# Altium PCB PCB_Mainboard.PcbDoc
Units mil, origin at the board's own origin, x right, y up, seen from the top; angles counter-clockwise.
Board outline 8863.19 x 4814.23 mil, 2 copper layers (Top Layer, Bottom Layer); 43 components, 31 nets, 377 pads, 3 vias.
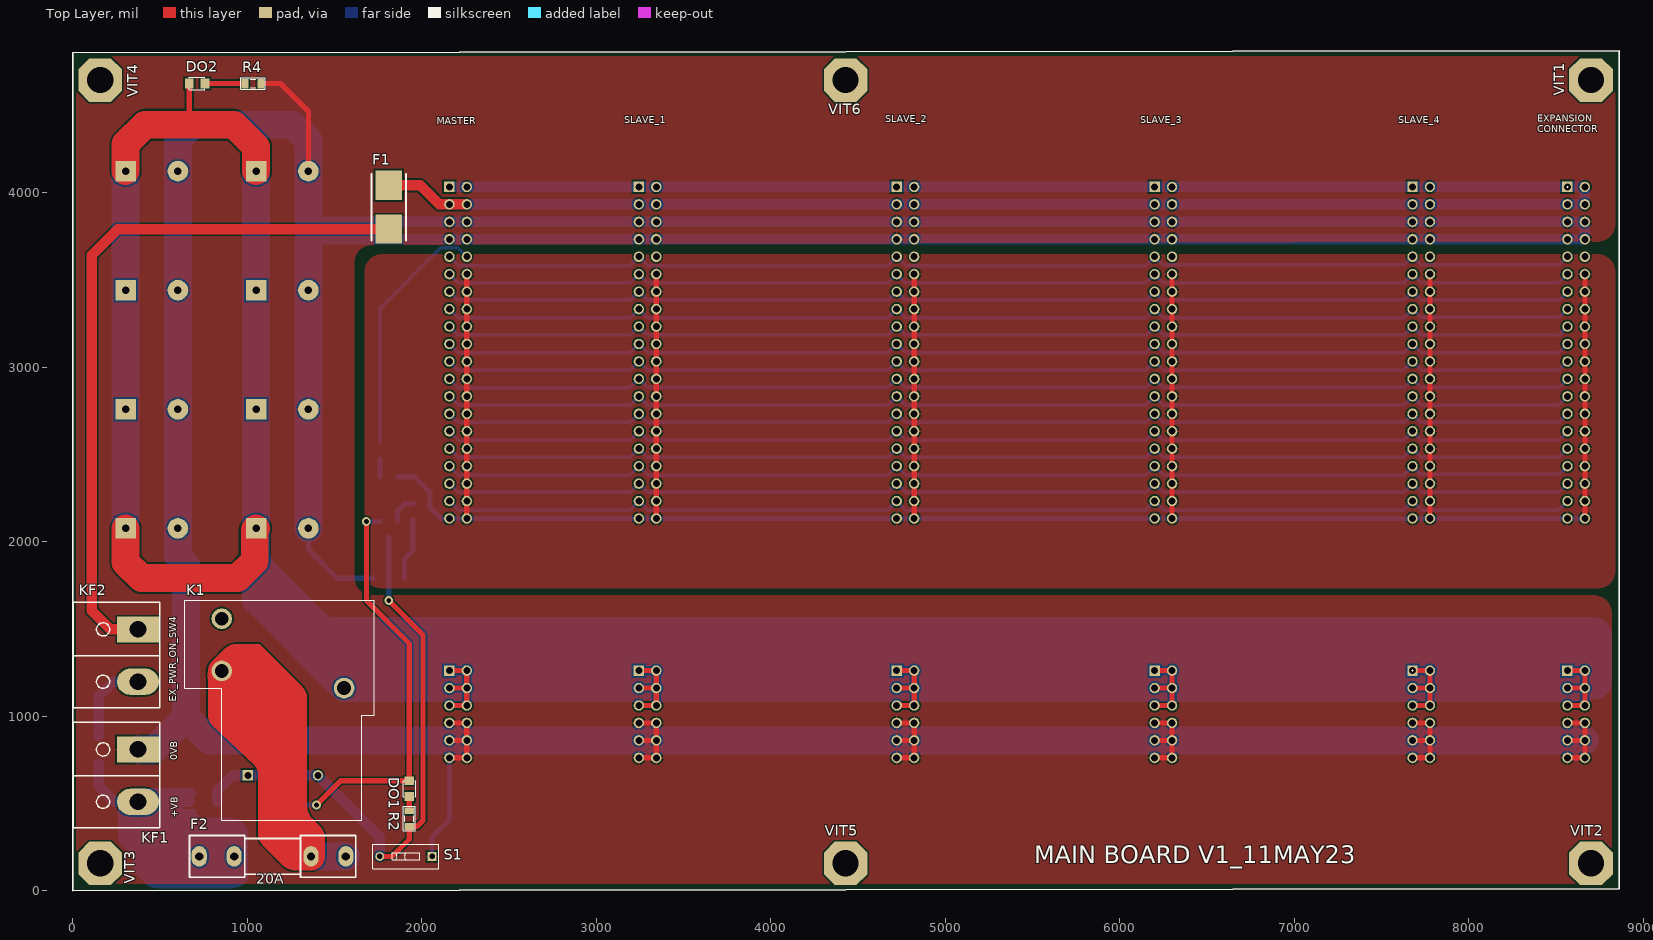
[diagram p0: Top Layer view]
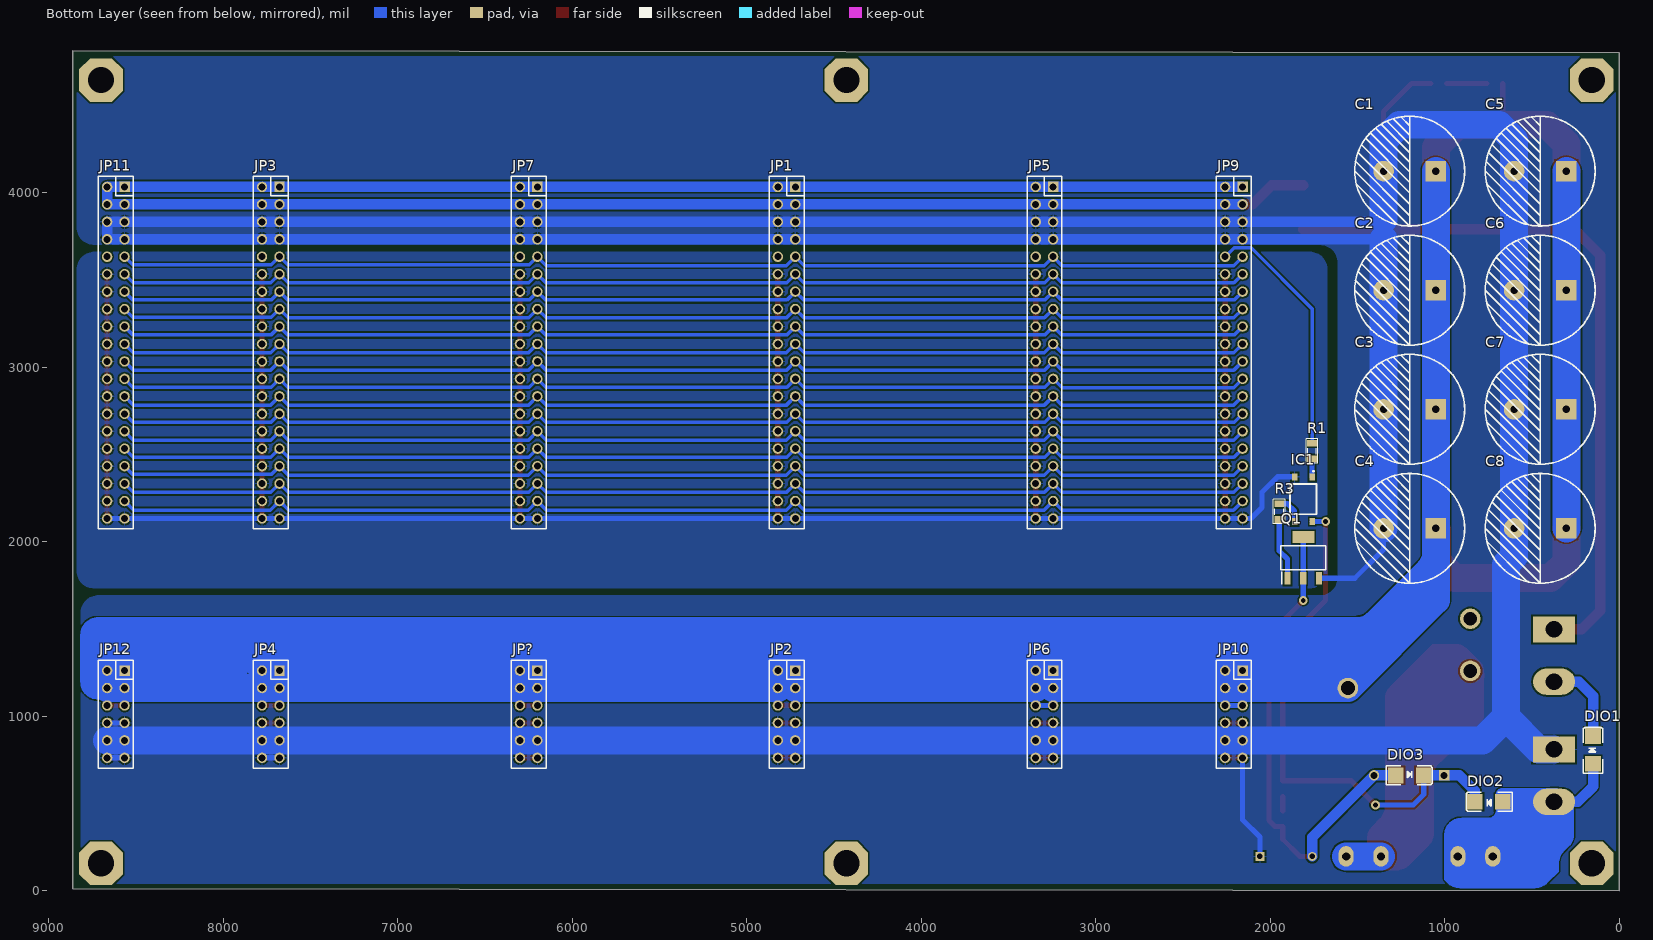
[diagram p1: Bottom Layer view, seen from below]

## Layer stack, top to bottom
Top Solder: solder mask 0.4, Solder Resist, Dk 3.5
Top Layer: signal copper 1.4
Dielectric 1: dielectric 12.6, FR-4, Dk 4.8
Bottom Layer: signal copper 1.4
Bottom Solder: solder mask 0.4, Solder Resist, Dk 3.5

## Board outline
0,0 0,4803.15 8863.19,4814.23 8863.19,11.08

## Design rules (kind name [scope] priority, off if disabled: settings)
Clearance [All] p1: gap=10
PolygonConnect [All] p1: connectstyle=Relief reliefconductorwidth=10 reliefentries=4 polygonreliefangle="90 Angle" airgapwidth=10
RoomDefinition Terminal [InComponentClass('Terminal')] p1: confinementstyle=ConfineIn formatcopy=TRUE lockcomponents=FALSE outline 8917.31,59.05 9507.85,59.05 9507.85,433.07 8917.31,433.07
RoutingVias [All] p1: holewidth=28 width=50 viastyle="Through Hole" minholewidth=28 minwidth=50 maxholewidth=28 maxwidth=50
SolderMaskExpansion [All] p1: expansion=4
Width [All] p1: maxlimit=160 minlimit=20 preferedwidth=30
30 further rules are at their usual default settings.

## Components (designator, comment, footprint, x,y, rotation, side; value= is the part's Value field where it differs from the comment)
C1 "2200uF" "tu hoa 16mm" 1201.29,4124.02 r180 bottom
C2 "2200uF" "tu hoa 16mm" 1201.29,3441.6 r180 bottom
C3 "2200uF" "tu hoa 16mm" 1201.29,2759.19 r180 bottom
C4 "2200uF" "tu hoa 16mm" 1201.29,2076.77 r180 bottom
C5 "2200uF" "tu hoa 16mm" 453.26,4124.02 r180 bottom
C6 "2200uF" "tu hoa 16mm" 453.26,3441.6 r180 bottom
C7 "2200uF" "tu hoa 16mm" 453.26,2759.19 r180 bottom
C8 "2200uF" "tu hoa 16mm" 453.26,2076.77 r180 bottom
DIO1 "Diode SMD" DIO-SMD-106 150.52,807.09 r270 bottom
DIO2 "Diode SMD" DIO-SMD-106 748.03,509.96 r180 bottom
DIO3 "Diode SMD" DIO-SMD-106 1200.79,661.42 r0 bottom
DO1 "LED" LED-0805-Yellow 1929.13,629.92 r270 top
DO2 "LED" LED-0805-Yellow 667.87,4625.98 r0 top
F1 "0154004.DR" 0154001.DRT 1811.02,3917.32 r90 top
F2 "F1A" Fuse1 1145.83,196.85 r0 top
IC1 "LTV-357T" LTV-357T 1811.02,2244.09 r0 bottom
JP1 "JP 2x20 2.54" "JP 2x20 CT" 4772.24,3083.46 r270 bottom
JP2 "JP 2x6 2.54" "JP 2x6 CT" 4772.24,1011.81 r270 bottom
JP3 "JP 2x20 2.54" "JP 2x20 CT" 7728.15,3083.46 r270 bottom
JP4 "JP 2x6 2.54" "JP 2x6 CT" 7728.15,1011.81 r270 bottom
JP5 "JP 2x20 2.54" "JP 2x20 CT" 3294.29,3083.46 r270 bottom
JP6 "JP 2x6 2.54" "JP 2x6 CT" 3294.29,1011.81 r270 bottom
JP7 "JP 2x20 2.54" "JP 2x20 CT" 6250.2,3083.46 r270 bottom
JP9 "JP 2x20 2.54" "JP 2x20 CT" 2208.86,3083.46 r270 bottom
JP10 "JP 2x6 2.54" "JP 2x6 CT" 2208.86,1011.81 r270 bottom
JP11 "JP 2x20 2.54" "JP 2x20 CT" 8615.94,3083.46 r270 bottom
JP12 "JP 2x6 2.54" "JP 2x6 CT" 8615.94,1011.81 r270 bottom
JP? "JP 2x6 2.54" "JP 2x6 CT" 6250.2,1011.81 r270 bottom
K1 "SLA-24VDC-SL-A" SLA24VDCSLA 1003.94,661.42 r0 top
KF1 "CON 2 KF7.62" "CON 2 KF7.62" 374.06,807.96 r270 top
KF2 "CON 2 KF7.62" "CON 2 KF7.62" 374.06,1496.06 r270 top
Q1 "BCP54TA" SOT230P700X165-4N 1811.02,1909.45 r90 bottom
R1 "820R" RES-SMD-0805 1761.02,2519.68 r90 bottom
R2 "2.2k" RES-SMD-0805 1929.13,413.39 r270 top
R3 "820R" RES-SMD-0805 1948.82,2173.23 r90 bottom
R4 "2.2k" RES-SMD-0805 1033.45,4625.98 r0 top
S1 "=partNo" SW-DIP1-1 1909.45,196.85 r90 top
VIT1 "1" VIT 8700.79,4645.67 r0 top
VIT2 "1" VIT 8700.79,157.48 r0 top
VIT3 "1" VIT 157.48,157.48 r0 top
VIT4 "1" VIT 157.48,4645.67 r0 top
VIT5 "1" VIT 4429.13,157.48 r0 top
VIT6 "1" VIT 4429.13,4645.67 r0 top

## Footprints (in the part's own frame and the unit in brackets; to place one, negate y for a bottom-side part, rotate by r counter-clockwise, add the part's x,y. Pads: shape width x height; smd on the part's side, far side on the other; paste and mask are expansions set on the pad)
0154001.DRT [mil]
  rect 167x150 smd: 1(-125.5,0) 2(125.5,0)
  silkscreen extent -192,-99 192,99, body extent -192,-99 192,99, height 150
"CON 2 KF7.62" [mil]
  rect 150x240 hole 95: 1(-2,0)
  oval 150x240 hole 95: 2(298,0)
  silkscreen extent -157,-370 448,126, body extent -152,-370 448,122, height 493
DIO-SMD-106 [mil]
  rect 90x90.55 smd: 1(80,0) 2(-80,0)
  silkscreen extent -130,-55 135,55, body extent -99,-50 106,52, height 95
Fuse1 [mm]
  oval 2.2x3 hole 1.2: 1(-10.684,0) 1(-5.604,0) 2(5.579,0) 2(10.659,0)
  silkscreen extent -12.12,-3.05 12.09,3.05, body extent -10.84,-2.95 10.87,2.95, height 9.75
"JP 2x6 CT" [mm] "12 pins, dual row, straight, gold plating"
  rect 1.52x1.52 hole 1.02: 1(-6.35,1.27)
  round 1.52 hole 1.02: 2(-3.81,1.27) 3(-1.27,1.27) 4(1.27,1.27) 5(3.81,1.27) 6(6.35,1.27) 7(6.35,-1.27) 8(3.81,-1.27) 9(1.27,-1.27) 10(-1.27,-1.27) 11(-3.81,-1.27) 12(-6.35,-1.27)
  silkscreen extent -7.87,-2.54 7.87,2.54, body extent -7.87,-2.54 7.87,2.54, height 8.51
"JP 2x20 CT" [mm] "40 pins, dual row, straight, gold plating"
  rect 1.52x1.52 hole 1.02: 1(-24.13,1.27)
  round 1.52 hole 1.02: 2(-21.59,1.27) 3(-19.05,1.27) 4(-16.51,1.27) 5(-13.97,1.27) 6(-11.43,1.27) 7(-8.89,1.27) 8(-6.35,1.27) 9(-3.81,1.27) 11(1.27,1.27) 12(3.81,1.27) 13(6.35,1.27) 14(8.89,1.27) 15(11.43,1.27) 16(13.97,1.27) 17(16.51,1.27) 18(19.05,1.27) 19(21.59,1.27) 20(24.13,1.27) 21(24.13,-1.27) 22(21.59,-1.27) 23(19.05,-1.27) 24(16.51,-1.27) 25(13.97,-1.27) 26(11.43,-1.27) 27(8.89,-1.27) 28(6.35,-1.27) 29(3.81,-1.27) 30(1.27,-1.27) 31(-1.27,-1.27) 32(-3.81,-1.27) 33(-6.35,-1.27) 34(-8.89,-1.27) 35(-11.43,-1.27) 36(-13.97,-1.27) 37(-16.51,-1.27) 38(-19.05,-1.27) 39(-21.59,-1.27) 40(-24.13,-1.27)
  round 1.52 hole 1.02 mask+0.102: 10(-1.27,1.27)
  silkscreen extent -25.65,-2.54 25.65,2.54, body extent -25.65,-2.54 25.65,2.54, height 8.51
LED-0805-Yellow [mil]
  rect 50x55 smd: 1(0,0) 2(90,0)
  silkscreen extent 0,-35 90,35, body extent 5,-25 85,25, height 43
LTV-357T [mm]
  rect 0.8x1 smd: 1(-1.27,-3.25) 2(1.27,-3.25) 3(1.27,3.25) 4(-1.27,3.25)
  silkscreen extent -1.92,-4.14 1.92,2.2, body extent -1.92,-3.5 1.92,3.5, height 2.1
RES-SMD-0805 [mil]
  rect 39.37x55 smd: 1(-45,0) 2(45,0)
  silkscreen extent -70,-34 70,33, body extent -39,-25 39,25, height 31
SLA24VDCSLA [mm]
  rect 1.5x1.5 hole 1: 1(0,0)
  round 1.5 hole 1: 2(10.2,0)
  round 3 hole 2: 3(14,12.7) 4(-3.8,15.2) 5(-3.8,22.8)
  silkscreen extent -9.2,-6.5 18.4,25.5
SOT230P700X165-4N [mm]
  rect 1.8x0.9 smd: 1(-3,2.3) 2(-3,0) 3(-3,-2.3)
  rect 1.8x3.2 smd: 4(3,0)
  silkscreen extent -3.9,-3.25 1.75,3.25, body extent -3.5,-3.25 3.5,3.25, height 1.65
SW-DIP1-1 [mm] "01p, 2.54mm Pitch, Horizontal, Box Type, THT, flat Actuator, red, without Tape, Tube"
  rect 1.3x1.3 hole 0.8: 1(0,-3.81)
  round 1.3 hole 0.8: 2(0,3.81)
  silkscreen extent -1.77,-4.8 1.77,4.8, body extent -1.77,-4.8 1.77,4.8, height 5.4
"tu hoa 16mm" [mm]
  rect 3x3 hole 1.1: 1(3.8,0)
  round 3 hole 1.1: 2(-3.8,0)
  silkscreen extent -8,-8 8,8, body extent -8.25,-8.25 8.25,8.25, height 28.91
VIT [mil] "VIT"
  oct 250x250 hole 150: VIT1(0,0)

## Part data
C1 C2 C3 C4 C5 C6 C7 C8: library part "Tu Hoa 2200uF 35V 16x25", "C?m"
DIO1 DIO2 DIO3: "Default Diode"
DO1 DO2: library part "LED SMD"
F1: "Fuse"
F2: library part Fuse, "Fuse"
IC1: "Integrated Circuit"
JP1 JP3 JP5 JP7 JP9 JP11: library part "JP 2x20 2.54 Cai Thang", "C?m"
JP2 JP4 JP6 JP10 JP12 JP?: library part "JP 2x6 2.54 Cai Thang", "C?m"
K1: "Relay or Contactor"
KF1 KF2: "C?m"
Q1: "Transistor BJT NPN"
R1 R2 R3 R4: library part Res-SMD, "Resistor"
S1: library part SWDIP1, "WS-DITV 2.54 mm small compact THT flat actuator with top tape"
VIT1 VIT2 VIT3 VIT4 VIT5 VIT6: library part VIT, "Oc Vit"

## Via types
v1: diameter 50, hole 28, Top Layer to Bottom Layer, 3 vias

## Nets (pads, with @x,y where several pads share a name; then routed paths per layer and width w, separated by ;. In a path a pad name is that pad's centre, name@x,y a point inside that pad or via, vN(x,y) a via of type N, cw(c..) or ccw(c..) an arc to the next point about the centre after c; other vN are vias at no path point)
+VB_IN: DIO1.1 DIO2.1 F2.1 KF1.2 | length 1466.9
  Bottom Layer w60: DIO1.1 150.52,597.51 238.07,509.96 KF1.2 DIO2.1
  Bottom Layer w160: KF1.2 374.06,334.6 511.81,196.85 725.2,196.85 F2.1@925.2,196.85
+VCC: F1.2 JP1.1 JP1.2 JP1.39 JP1.40 JP3.1 JP3.2 JP3.39 JP3.40 JP5.1 JP5.2 JP5.39 JP5.40 JP7.1 JP7.2 JP7.39 JP7.40 JP9.1 JP9.2 JP9.39 JP9.40 JP11.1 JP11.2 JP11.39 JP11.40 | length 13607.3
  Top Layer w60: F1.2 1990.64,4042.82 2100,3933.46 JP9.2 JP9.39
  Bottom Layer w60: JP9.2 JP9.39 JP5.2 JP5.39 JP1.2 JP1.39 JP7.2 JP7.39 JP3.2 JP3.39 JP11.2 JP11.39 JP11.40 JP11.1 JP3.40 JP3.1 JP7.40 JP7.1 JP1.40 JP1.1 JP5.40 JP5.1 JP9.40 JP9.1
+VS: C1.1 C2.1 C3.1 C4.1 C5.1 C6.1 C7.1 C8.1 DO2.1 JP2.1 JP2.2 JP2.3 JP2.10 JP2.11 JP2.12 JP4.1 JP4.2 JP4.3 JP4.10 JP4.11 JP4.12 JP6.1 JP6.2 JP6.3 JP6.10 JP6.11 JP6.12 JP10.1 JP10.2 JP10.3 JP10.10 JP10.11 JP10.12 JP12.1 JP12.2 JP12.3 JP12.10 JP12.11 JP12.12 JP?.1 JP?.2 JP?.3 JP?.10 JP?.11 JP?.12 K1.3 | length 18810.9
  Top Layer w30: DO2.1 667.87,4391.18 669.29,4389.76 ; JP10.3 JP10.10 JP10.11 ; JP10.2 JP10.11 ; JP10.1 JP10.12 JP10.11 ; JP6.3 JP6.10 JP6.11 ; JP6.2 JP6.11 ; JP6.1 JP6.12 JP6.11 ; JP2.3 JP2.10 JP2.11 ; JP2.2 JP2.11 ; JP2.1 JP2.12 JP2.11 ; JP?.3 JP?.10 JP?.11 ; JP?.2 JP?.11 ; JP?.1 JP?.12 JP?.11 ; JP4.3 JP4.10 JP4.11 ; JP4.2 JP4.11 ; JP4.1 JP4.12 JP4.11 ; JP12.3 JP12.10 JP12.11 ; JP12.2 JP12.11 ; JP12.1 JP12.12 JP12.11
  Top Layer w160: C8.1 303.65,1881.43 393.74,1791.34 944.88,1791.34 1043.31,1889.76 1043.31,2068.4 C4.1 ; C5.1 303.65,4279.98 413.43,4389.76 669.29,4389.76 925.2,4389.76 1051.68,4263.28 C1.1
  Bottom Layer w30: JP10.3 JP10.10 JP10.11 ; JP6.3 JP6.10 JP6.11 ; JP?.10 JP?.11
  Bottom Layer w160: C8.1 C7.1 C6.1 C5.1 ; C1.1 C3.1 C4.1 1051.68,1664.85 K1.3 2158.46,1161.42 JP10.2 JP10.11 JP6.2 ; JP10.1 JP10.12 ; JP6.1 JP6.12 ; JP6.11 JP2.2 ; JP2.1 JP2.12 ; JP2.11 JP?.2 JP?.11 JP4.2 JP4.11 JP12.2 JP12.11 ; JP?.1 JP?.12 ; JP4.1 JP4.12 ; JP12.1 JP12.12
AI_1: JP1.16 JP3.16 JP5.16 JP7.16 JP9.16 JP11.16 | length 6610.9
  Bottom Layer w20: JP9.16 2208.07,2484.25 3195.08,2484.25 JP5.16 3293.5,2484.25 4673.03,2484.25 JP1.16 4771.46,2484.25 6150.98,2484.25 JP7.16 6249.41,2484.25 7628.94,2484.25 JP3.16 7727.36,2484.25 8516.73,2484.25 JP11.16
AI_2: JP1.17 JP3.17 JP5.17 JP7.17 JP9.17 JP11.17 | length 6617.5
  Bottom Layer w20: JP9.17 2210.43,2381.89 3192.72,2381.89 JP5.17 3295.87,2381.89 4670.67,2381.89 JP1.17 4773.82,2381.89 6148.62,2381.89 JP7.17 6251.77,2381.89 7626.57,2381.89 JP3.17 7725.79,2385.83 8518.31,2385.83 JP11.17
AI_3: JP1.14 JP3.14 JP5.14 JP7.14 JP9.14 JP11.14 | length 6607.7
  Bottom Layer w20: JP9.14 2207.28,2685.04 3195.87,2685.04 JP5.14 3292.72,2685.04 4673.82,2685.04 JP1.14 4770.67,2685.04 6151.77,2685.04 JP7.14 6248.62,2685.04 7629.72,2685.04 JP3.14 7726.57,2685.04 8517.52,2685.04 JP11.14
AI_4: JP1.15 JP3.15 JP5.15 JP7.15 JP9.15 JP11.15 | length 6617.5
  Bottom Layer w20: JP9.15 2209.65,2582.68 3193.5,2582.68 JP5.15 3295.08,2582.68 4671.46,2582.68 JP1.15 4773.03,2582.68 6149.41,2582.68 JP7.15 6250.98,2582.68 7627.36,2582.68 JP3.15 7728.94,2582.68 8515.16,2582.68 JP11.15
COIL: DIO3.1 K1.2 Q1.2 Q1.4 R2.2 S1.2 | length 2818.3
  Top Layer w30: S1.2 1830.71,196.85 1929.13,295.28 R2.2 1972.72,368.39 2007.87,403.54 2007.87,1466.54 v1(1811.02,1663.39)
  Bottom Layer w30: v1(1811.02,1663.39) Q1.2 Q1.4
  Bottom Layer w60: DIO3.1 K1.2 1759.45,307.48 S1.2
DI_0: JP1.8 JP3.8 JP5.8 JP7.8 JP9.8 JP11.8 | length 6610.9
  Bottom Layer w20: JP9.8 2208.86,3283.46 3194.29,3283.46 JP5.8 3294.29,3283.46 4672.24,3283.46 JP1.8 4772.24,3283.46 6150.2,3283.46 JP7.8 6250.2,3283.46 7628.15,3283.46 JP3.8 7724.21,3287.4 8519.88,3287.4 JP11.8
DI_1: JP1.9 JP3.9 JP5.9 JP7.9 JP9.9 JP11.9 | length 6607.7
  Bottom Layer w20: JP9.9 2207.28,3185.04 3195.87,3185.04 JP5.9 3292.72,3185.04 4673.82,3185.04 JP1.9 4770.67,3185.04 6151.77,3185.04 JP7.9 6248.62,3185.04 7629.72,3185.04 JP3.9 7726.57,3185.04 8517.52,3185.04 JP11.9
DI_2: JP1.10 JP3.10 JP5.10 JP7.10 JP9.10 JP11.10 | length 6617.5
  Bottom Layer w20: JP9.10 2209.65,3082.68 3193.5,3082.68 JP5.10 3295.08,3082.68 4671.46,3082.68 JP1.10 4773.03,3082.68 6149.41,3082.68 JP7.10 6250.98,3082.68 7627.36,3082.68 JP3.10 7728.94,3082.68 8515.16,3082.68 JP11.10
DI_3: JP1.11 JP3.11 JP5.11 JP7.11 JP9.11 JP11.11 | length 6610.9
  Bottom Layer w20: JP9.11 2208.07,2984.25 3195.08,2984.25 JP5.11 3293.5,2984.25 4673.03,2984.25 JP1.11 4771.46,2984.25 6150.98,2984.25 JP7.11 6249.41,2984.25 7628.94,2984.25 JP3.11 7727.36,2984.25 8516.73,2984.25 JP11.11
EX_DIR: JP1.5 JP3.5 JP5.5 JP7.5 JP9.5 JP11.5 | length 6610.9
  Bottom Layer w20: JP9.5 2209.65,3582.68 3193.5,3582.68 JP5.5 3295.08,3582.68 4671.46,3582.68 JP1.5 4773.03,3582.68 6149.41,3582.68 JP7.5 6247.05,3586.61 7631.3,3586.61 JP3.5 7725,3586.61 8519.09,3586.61 JP11.5
GND: IC1.2 JP1.20 JP1.21 JP1.22 JP1.23 JP1.24 JP1.25 JP1.26 JP1.27 JP1.28 JP1.29 JP1.30 JP1.31 JP1.32 JP1.33 JP1.34 JP1.35 JP3.20 JP3.21 JP3.22 JP3.23 JP3.24 JP3.25 JP3.26 JP3.27 JP3.28 JP3.29 JP3.30 JP3.31 JP3.32 JP3.33 JP3.34 JP3.35 JP5.20 JP5.21 JP5.22 JP5.23 JP5.24 JP5.25 JP5.26 JP5.27 JP5.28 JP5.29 JP5.30 JP5.31 JP5.32 JP5.33 JP5.34 JP5.35 JP7.20 JP7.21 JP7.22 JP7.23 JP7.24 JP7.25 JP7.26 JP7.27 JP7.28 JP7.29 JP7.30 JP7.31 JP7.32 JP7.33 JP7.34 JP7.35 JP9.20 JP9.21 JP9.22 JP9.23 JP9.24 JP9.25 JP9.26 JP9.27 JP9.28 JP9.29 JP9.30 JP9.31 JP9.32 JP9.33 JP9.34 JP9.35 JP11.20 JP11.21 JP11.22 JP11.23 JP11.24 JP11.25 JP11.26 JP11.27 JP11.28 JP11.29 JP11.30 JP11.31 JP11.32 JP11.33 JP11.34 JP11.35 | length 15354.3
  Top Layer w30: JP9.21 JP9.22 JP9.23 JP9.24 JP9.25 JP9.26 2258.86,2728.35 JP9.28 JP9.29 JP9.30 JP9.31 JP9.32 JP9.33 JP9.34 JP9.35 ; JP5.21 JP5.22 JP5.25 JP5.26 JP5.27 JP5.28 JP5.29 JP5.30 JP5.31 JP5.32 JP5.33 JP5.34 JP5.35 ; JP1.21 JP1.22 JP1.23 JP1.24 JP1.25 JP1.26 JP1.27 JP1.28 JP1.29 JP1.30 JP1.31 JP1.32 JP1.33 JP1.34 JP1.35 ; JP7.21 JP7.22 JP7.23 JP7.24 JP7.25 JP7.26 JP7.27 JP7.28 JP7.29 JP7.30 JP7.31 JP7.32 JP7.33 JP7.34 JP7.35 ; JP3.21 JP3.22 JP3.23 JP3.24 JP3.25 JP3.26 JP3.27 JP3.28 JP3.29 JP3.30 JP3.31 JP3.32 JP3.33 JP3.34 JP3.35 ; JP11.21 JP11.22 JP11.23 JP11.24 JP11.25 JP11.26 JP11.27 JP11.28 JP11.29 JP11.30 JP11.31 JP11.32 JP11.33 JP11.34 JP11.35
  Bottom Layer w30: IC1.2 1958.66,2372.05 2047.24,2283.46 2047.24,2197.24 2111.02,2133.46 JP9.20 JP9.21 JP5.20 JP5.21 JP1.20 JP1.21 JP7.20 JP7.21 JP3.20 JP3.21 JP11.20 JP11.21
GND_iso: C1.2 C2.2 C3.2 C4.2 C5.2 C6.2 C7.2 C8.2 JP1.3 JP1.4 JP1.37 JP1.38 JP2.4 JP2.5 JP2.6 JP2.7 JP2.8 JP2.9 JP3.3 JP3.4 JP3.37 JP3.38 JP4.4 JP4.5 JP4.6 JP4.7 JP4.8 JP4.9 JP5.3 JP5.4 JP5.37 JP5.38 JP6.4 JP6.5 JP6.6 JP6.7 JP6.8 JP6.9 JP7.3 JP7.4 JP7.37 JP7.38 JP9.3 JP9.4 JP9.37 JP9.38 JP10.4 JP10.5 JP10.6 JP10.7 JP10.8 JP10.9 JP11.3 JP11.4 JP11.37 JP11.38 JP12.4 JP12.5 JP12.6 JP12.7 JP12.8 JP12.9 JP?.4 JP?.5 JP?.6 JP?.7 JP?.8 JP?.9 KF1.1 Q1.3 R4.2 S1.1 | length 34561.7
  Top Layer w30: R4.2 1190.95,4625.98 1350.89,4466.03 C1.2 ; JP10.6 JP10.7 JP10.8 ; JP10.5 JP10.8 ; JP10.4 JP10.9 JP10.8 ; JP6.6 JP6.7 JP6.8 ; JP6.5 JP6.8 ; JP6.4 JP6.9 JP6.8 ; JP2.6 JP2.7 JP2.8 ; JP2.5 JP2.8 ; JP2.4 JP2.9 JP2.8 ; JP?.6 JP?.7 JP?.8 ; JP?.5 JP?.8 ; JP?.4 JP?.9 JP?.8 ; JP4.6 JP4.7 JP4.8 ; JP4.5 JP4.8 ; JP4.4 JP4.9 JP4.8 ; JP12.6 JP12.7 JP12.8 ; JP12.5 JP12.8 ; JP12.4 JP12.9 JP12.8
  Bottom Layer w30: C4.2 1350.89,1956.19 1515.75,1791.34 Q1.3 ; S1.1 2059.45,307.48 2158.86,406.89 JP10.6 ; JP4.6 JP4.7 ; JP12.6 JP12.7 ; JP12.4 JP12.9
  Bottom Layer w60: 1350.89,3733.46 JP9.4 JP9.37 JP5.4 JP5.37 JP1.4 JP1.37 JP7.4 JP7.37 JP3.4 JP3.37 JP11.4 JP11.37 JP11.38 JP11.3 JP3.38 JP3.3 JP7.38 JP7.3 JP1.38 JP1.3 JP5.38 JP5.3 JP9.38 JP9.3 1365.85,3833.46 1350.89,3848.43
  Bottom Layer w160: KF1.1 464.29,809.96 649.61,995.28 ; C4.2 C3.2 C2.2 1350.89,3733.46 ; 1350.89,3848.43 C1.2 1350.89,4298.71 1259.84,4389.76 688.98,4389.76 602.86,4303.65 C5.2 C6.2 C7.2 C8.2 602.86,1916.82 649.61,1870.08 649.61,995.28 ; JP12.8 JP12.5 JP4.8 JP4.5 JP?.8 JP?.5 JP2.8 JP2.5 JP6.8 JP6.5 JP10.8 JP10.5 783.07,861.81 649.61,995.28
M_SCL_ISO: JP1.18 JP3.18 JP5.18 JP7.18 JP9.18 JP11.18 | length 6614.2
  Bottom Layer w20: JP9.18 2208.86,2283.46 3194.29,2283.46 JP5.18 3294.29,2283.46 4672.24,2283.46 JP1.18 4772.24,2283.46 6150.2,2283.46 JP7.18 6250.2,2283.46 7628.15,2283.46 JP3.18 7728.15,2283.46 8515.94,2283.46 JP11.18
M_SDA_ISO: JP1.19 JP3.19 JP5.19 JP7.19 JP9.19 JP11.19 | length 6624
  Bottom Layer w20: JP9.19 2211.22,2181.1 3191.93,2181.1 JP5.19 3296.65,2181.1 4669.88,2181.1 JP1.19 4774.61,2181.1 6147.83,2181.1 JP7.19 6252.56,2181.1 7625.79,2181.1 JP3.19 7730.51,2181.1 8513.58,2181.1 JP11.19
NetDIO1_2: DIO1.2 KF2.2 | length 485.9
  Bottom Layer w60: DIO1.2 150.52,1115.09 233.5,1198.06 KF2.2
NetDIO2_2: DIO2.2 DIO3.2 DO1.1 IC1.4 K1.1 | length 3057.4
  Top Layer w30: v1(1397.64,492.13) 1535.43,629.92 DO1.1 1929.13,1417.32 1683.07,1663.39 v1(1683.07,2116.14)
  Bottom Layer w30: DIO3.2 1120.79,552.44 1181.1,492.13 v1(1397.64,492.13) ; v1(1683.07,2116.14) IC1.4
  Bottom Layer w60: DIO2.2 828.03,572.13 917.32,661.42 K1.1 DIO3.2
NetDO1_2: DO1.2 R2.1 | length 81.5
  Top Layer w30: R2.1 DO1.2
NetDO2_2: DO2.2 R4.1 | length 230.6
  Top Layer w30: DO2.2 R4.1
NetF1_1: F1.1 KF2.1 | length 4112.1
  Top Layer w60: KF2.1 214.54,1498.06 108.27,1604.33 108.27,3641.73 258.36,3791.82 F1.1
NetF2_2: F2.2 K1.4 | length 1474.7
  Top Layer w160: K1.4 1200.79,913.39 1200.79,361.52 F2.2@1365.46,196.85
  Bottom Layer w160: F2.2@1365.46,196.85 F2.2@1565.46,196.85
NetIC1_1: IC1.1 R1.1 | length 102.6
  Bottom Layer w30: IC1.1 R1.1
NetIC1_3: IC1.3 R3.2 | length 165.1
  Bottom Layer w30: IC1.3 1861.02,2175.98 1903.27,2218.23 R3.2
NetQ1_1: Q1.1 R3.1 | length 356.5
  Bottom Layer w30: Q1.1 1901.57,1901.57 1948.82,1948.82 R3.1
PULSE_CMD: JP1.7 JP3.7 JP5.7 JP7.7 JP9.7 JP11.7 | length 6604.4
  Bottom Layer w20: JP9.7 2206.5,3385.83 3196.65,3385.83 JP5.7 3291.93,3385.83 4674.61,3385.83 JP1.7 4769.88,3385.83 6152.56,3385.83 JP7.7 6247.83,3385.83 7630.51,3385.83 JP3.7 7725.79,3385.83 8518.31,3385.83 JP11.7
PWR_ON_Cmd: JP9.36 R1.2 | length 1435
  Bottom Layer w20: R1.2 1761.02,3335.83 2110.24,3685.04 2207.28,3685.04 JP9.36
RS485_A2: JP1.12 JP3.12 JP5.12 JP7.12 JP9.12 JP11.12 | length 6607.7
  Bottom Layer w20: JP9.12 2210.43,2881.89 3192.72,2881.89 JP5.12 3291.93,2885.83 4674.61,2885.83 JP1.12 4769.88,2885.83 6152.56,2885.83 JP7.12 6247.83,2885.83 7630.51,2885.83 JP3.12 7725.79,2885.83 8518.31,2885.83 JP11.12
RS485_B2: JP1.13 JP3.13 JP5.13 JP7.13 JP9.13 JP11.13 | length 6614.2
  Bottom Layer w20: JP9.13 2208.86,2783.46 3194.29,2783.46 JP5.13 3294.29,2783.46 4672.24,2783.46 JP1.13 4772.24,2783.46 6150.2,2783.46 JP7.13 6250.2,2783.46 7628.15,2783.46 JP3.13 7728.15,2783.46 8515.94,2783.46 JP11.13
S_LOCK: JP1.6 JP3.6 JP5.6 JP7.6 JP9.6 JP11.6 | length 6610.9
  Bottom Layer w20: JP9.6 2208.07,3484.25 3195.08,3484.25 JP5.6 3293.5,3484.25 4673.03,3484.25 JP1.6 4771.46,3484.25 6150.98,3484.25 JP7.6 6249.41,3484.25 7628.94,3484.25 JP3.6 7727.36,3484.25 8516.73,3484.25 JP11.6
pads on no net: JP1.36 JP3.36 JP5.36 JP7.36 JP11.36 K1.5 VIT1.VIT1 VIT2.VIT1 VIT3.VIT1 VIT4.VIT1 VIT5.VIT1 VIT6.VIT1

## Polygon pours and split planes (outlines as drawn)
GND_iso on Bottom Layer "Bottom Layer-GND_iso" (solid, pour order 2): 8738.58,4783.46 cw(c8738.58,4683.46) 8838.58,4683.46 8838.58,3800.79 cw(c8738.58,3800.79) 8738.58,3700.79 1714.17,3700.79 ccw(c1714.17,3600.79) 1614.17,3600.79 1614.17,1792.91 ccw(c1714.17,1792.91) 1714.17,1692.91 8716.63,1692.91 cw(c8716.63,1592.91) 8816.63,1592.91 8816.63,139.37 cw(c8716.63,139.37) 8716.63,39.37 119.69,39.37 cw(c119.69,139.37) 19.68,139.37 19.68,4683.46 cw(c119.69,4683.46) 119.69,4783.46
GND on Bottom Layer "Bottom Layer-GND" (solid, pour order 8): 1773.23,3661.42 ccw(c1773.23,3561.42) 1673.23,3561.42 1673.23,1832.28 ccw(c1773.23,1832.28) 1773.23,1732.28 8738.58,1732.28 ccw(c8738.58,1832.28) 8838.58,1832.28 8838.58,3561.42 ccw(c8738.58,3561.42) 8738.58,3661.42
GND_iso on Top Layer "Top Layer-GND_iso" (solid, pour order 4): 8149.61,3720.47 8738.58,3720.47 ccw(c8738.58,3820.47) 8838.58,3820.47 8838.58,4683.46 ccw(c8738.58,4683.46) 8738.58,4783.46 119.69,4783.46 ccw(c119.69,4683.46) 19.68,4683.46 19.68,139.37 ccw(c119.69,139.37) 119.69,39.37 8718.9,39.37 ccw(c8718.9,139.37) 8818.9,139.37 8818.9,1592.91 ccw(c8718.9,1592.91) 8718.9,1692.91 1714.17,1692.91 cw(c1714.17,1792.91) 1614.17,1792.91 1614.17,3600.79 cw(c1714.17,3600.79) 1714.17,3700.79 2106.3,3700.79
GND on Top Layer "Top Layer-GND" (solid, pour order 6): 1673.23,3547.93 cw(c1773.23,3547.93) 1773.23,3647.93 8738.58,3647.93 cw(c8738.58,3547.93) 8838.58,3547.93 8838.58,1832.28 cw(c8738.58,1832.28) 8738.58,1732.28 1773.23,1732.28 cw(c1773.23,1832.28) 1673.23,1832.28

## Other copper
Top Layer:
  region net NetF2_2: 1354.33,118.11 1273.7,118.11 cw(c1273.7,218.11) 1202.99,147.4 1092.28,258.11 cw(c1162.99,328.82) 1062.99,328.82 1062.99,643.62 ccw(c960.38,658.28) 1043.31,720.47 804.88,943.15 cw(c875.59,1013.86) 775.59,1013.86 775.59,1208.66 cw(c915.72,1233.3) 799.21,1314.96 791.34,1244.09 1120.32,915.12 cw(c1049.61,844.41) 1149.61,844.41 1149.61,334.65
  region net NetF2_2: 1444.88,200.79 1444.88,300.16 ccw(c1344.88,300.16) 1415.59,370.87 1371.81,414.65 cw(c1442.52,485.36) 1342.52,485.36 1342.52,1100.31 ccw(c1242.52,1100.31) 1313.23,1171.02 1070.87,1413.39 939.06,1413.39 ccw(c939.06,1313.39) 868.35,1384.1 799.21,1314.96 cw(c818.22,1295.95) 818.22,1322.83 877.95,1322.83 1214.81,985.98 cw(c1144.1,915.27) 1244.09,915.27 1244.09,433.53 ccw(c1311.56,433.53) 1263.86,385.83
Bottom Layer:
  region net +VB_IN: 259.84,488.19 259.84,324.89 ccw(c359.84,324.89) 289.13,254.18 317.17,226.14 cw(c246.46,155.43) 346.46,155.43 346.46,110.24 411.66,45.04 ccw(c482.37,115.75) 482.37,15.75 915.27,15.75 ccw(c915.27,115.75) 985.98,45.04 1000,59.06 ccw(c990.5,68.56) 1003.94,68.56 1003.94,196.85 cw(c975.42,196.85) 995.59,176.69 952.76,133.86 cw(c914.74,171.88) 914.74,118.11 700.79,118.11
  region net +VB_IN: 1003.94,196.85 1003.94,317.32 ccw(c903.94,317.32) 903.94,417.32 751.97,417.32 cw(c751.97,464.57) 704.72,464.57 ccw(c700.79,464.57) 700.79,468.5 633.86,468.5 cw(c633.86,480.31) 622.05,480.31 622.05,484.25 ccw(c618.11,484.25) 618.11,488.19 460.63,488.19 ccw(c460.63,464.57) 437.01,464.57 437.01,330.71 ccw(c468.5,330.71) 468.5,299.21 ccw(c496.06,299.21) 496.06,271.65 948.82,271.65 cw(c948.82,251.97) 968.5,251.97
  region net +VB_IN: 354.33,586.61 675.26,586.61 cw(c675.26,555.12) 706.76,555.12 cw(c683.14,555.12) 683.14,531.5 466.15,531.5 cw(c466.15,539.37) 458.28,539.37
  region net +VS: 1125.98,2000 1125.98,1950.87 ccw(c1225.98,1950.87) 1155.27,1880.16 1439.21,1596.22 ccw(c1509.93,1666.93) 1509.93,1566.93 8718.9,1566.93 cw(c8718.9,1466.93) 8818.9,1466.93 8818.9,1366.14 cw(c8759.84,1366.14) 8759.84,1307.09 8555.12,1307.09 ccw(c8555.12,1251.97) 8500,1251.97 cw(c8476.38,1251.97) 8476.38,1228.35 7905.51,1228.35 cw(c7905.51,1287.4) 7846.46,1287.4 ccw(c7814.96,1287.4) 7814.96,1318.9 7645.67,1318.9 ccw(c7645.67,1283.46) 7610.24,1283.46 7610.24,1232.28 cw(c7598.43,1232.28) 7598.43,1220.47 6421.26,1220.47 cw(c6421.26,1287.4) 6354.33,1287.4 ccw(c6311.02,1287.4) 6311.02,1330.71 6200.79,1330.71 ccw(c6200.79,1267.72) 6137.8,1267.72 6137.8,1259.84 cw(c6106.3,1259.84) 6106.3,1228.35 4925.2,1228.35 cw(c4925.2,1279.53) 4874.02,1279.53 ccw(c4830.71,1279.53) 4830.71,1322.83 4716.54,1322.83 ccw(c4716.54,1271.65) 4665.35,1271.65 4665.35,1232.28 cw(c4657.48,1232.28) 4657.48,1224.41 3448.82,1224.41 cw(c3448.82,1279.53) 3393.7,1279.53 ccw(c3358.27,1279.53) 3358.27,1314.96 3248.03,1314.96 ccw(c3248.03,1244.09) 3177.17,1244.09 3177.17,1236.22 cw(c3165.35,1236.22) 3165.35,1224.41 2362.2,1224.41 cw(c2362.2,1275.59) 2311.02,1275.59 ccw(c2279.53,1275.59) 2279.53,1307.09 2145.67,1307.09 ccw(c2145.67,1255.91) 2094.49,1255.91 2094.49,1244.09 cw(c2070.87,1244.09) 2070.87,1220.47 1624.1,1220.47 cw(c1624.1,1320.47) 1553.39,1249.76 1143.46,1659.69 cw(c1214.17,1730.4) 1114.17,1730.4 1114.17,1929.13
  region net +VS: 8818.9,1427.56 8818.9,1196.85 cw(c8718.9,1196.85) 8718.9,1096.85 8694.83,1096.85 ccw(c8694.83,1116.54) 8714.52,1116.54 8714.52,1360.63 cw(c8718.46,1360.63) 8718.46,1364.57
  region net +VB_IN: 688.98,160.33 556.55,160.33 cw(c556.55,260.33) 485.84,189.62 316.69,358.76 cw(c387.4,429.48) 287.4,429.48 287.4,454.69 447.58,454.69 cw(c447.58,407.77) 480.75,440.94 480.75,415 ccw(c580.75,415) 510.04,344.29 551.18,303.15 588.5,303.15 cw(c588.5,203.15) 659.21,273.86 696.85,236.22

## Silkscreen, mask and mechanical layers (free items; w line width, h text height)
Top Overlay:
  lines w10: 0,0 0,4803.15 8863.19,4814.23 8863.19,11.08 0,0 ; 7678.15,1261.81 7678.15,1261.81 ; 8565.94,4033.46 8565.94,4033.46
  text "SLAVE_2" at 4657.28,4403.54 h40
  text "SLAVE_1" at 3161.42,4397.64 h40
  text "SLAVE_3" at 6117.32,4397.64 h40
  text "SLAVE_4" at 7595.28,4397.64 h40
  text "MASTER" at 2086.61,4393.7 h40
  text "EXPANSION / CONNECTOR" at 8393.7,4346.46 h40
  text "EX_PWR_ON_SW4" at 594.49,1082.68 h40 r90
  text "0VB" at 598.43,748.03 h40 r90
  text "+VB" at 602.36,417.32 h40 r90
  text "MAIN BOARD V1_11MAY23" at 5511.81,157.48 h100
Top Solder:
  region: 1338.58,153.54 1324.89,153.54 cw(c1324.89,253.54) 1254.18,182.83 1174.96,262.05 cw(c1245.67,332.76) 1145.67,332.76 1145.67,848.34 ccw(c1045.67,848.34) 1116.38,919.05 826.77,1208.66 cw(c845.78,1189.65) 845.78,1216.54 874.02,1216.54 905.51,1248.03 ccw(c896.01,1257.54) 909.45,1257.54 909.45,1287.4 1226.62,970.23 cw(c1155.91,899.52) 1255.91,899.52 1255.91,372.13 ccw(c1355.91,372.13) 1285.19,301.42 1338.58,248.03
Bottom Solder:
  region: 1574.8,1220.47 1789.29,1220.47 ccw(c1789.29,1320.47) 1860,1249.76 1998.27,1388.03 cw(c2068.98,1317.32) 2068.98,1417.32 8661.42,1417.32 cw(c8661.42,1358.27) 8720.47,1358.27 cw(c8661.42,1358.27) 8661.42,1299.21 2108.35,1299.21 ccw(c2108.35,1199.22) 2037.64,1269.92 1899.37,1131.65 cw(c1828.66,1202.36) 1828.66,1102.36 1555.12,1102.36 1594.49,1141.73 1594.49,1200.79
  region: 8720.47,1358.27 8720.47,1342.89 cw(c8630.86,1342.89) 8694.23,1279.53 2125.7,1279.53 ccw(c2125.7,1179.53) 2054.99,1250.24 1938.33,1133.57 cw(c1867.62,1204.28) 1867.62,1104.28 1791.34,1104.28 2016.03,1328.98 cw(c2086.74,1258.27) 2086.74,1358.27 8676.62,1358.27 ccw(c8676.62,1417.08) 8718.2,1375.49
  region: 692.91,149.61 604.41,149.61 cw(c604.41,249.61) 533.7,178.9 340.31,372.29 cw(c411.02,443) 311.02,443 311.02,444.88 387.71,444.88 ccw(c387.71,544.88) 458.42,474.17 484.25,500 484.25,490.24 ccw(c584.25,490.24) 513.54,419.53 690.13,242.94 cw(c683.41,236.22) 692.91,236.22
  region: 1015.75,2133.46 1015.75,2700.62 cw(c1029.19,2700.62) 1019.68,2710.12 1078.74,2710.12 1078.74,2133.46
  region: 1015.75,2815.88 1015.75,3383.03 cw(c1029.19,3383.03) 1019.68,3392.54 1078.74,3392.54 1078.74,2815.88
  region: 1015.75,3498.29 1015.75,4065.45 cw(c1029.19,4065.45) 1019.68,4074.95 1078.74,4074.95 1078.74,3498.29
  region: 267.72,3498.29 267.72,4065.45 cw(c281.16,4065.45) 271.65,4074.95 330.71,4074.95 330.71,3498.29
  region: 267.72,2815.88 267.72,3383.03 cw(c281.16,3383.03) 271.65,3392.54 330.71,3392.54 330.71,2815.88
  region: 267.72,2133.46 267.72,2700.62 cw(c281.16,2700.62) 271.65,2710.12 330.71,2710.12 330.71,2133.46
  region: 1503.94,1169.29 1047.3,1625.93 cw(c1118.01,1696.64) 1018.01,1696.64 1018.01,2031.5 1074.8,2031.5 1074.8,1726.46 ccw(c1174.8,1726.46) 1104.09,1655.75 1540.36,1219.48 ccw(c1547.24,1226.37) 1547.24,1216.63

## Text inside footprints (layer, text, board x,y; h text height)
F2: Top Overlay "20A" at 1051.68,19.68 h100